# Allegro board control_pcb.brd
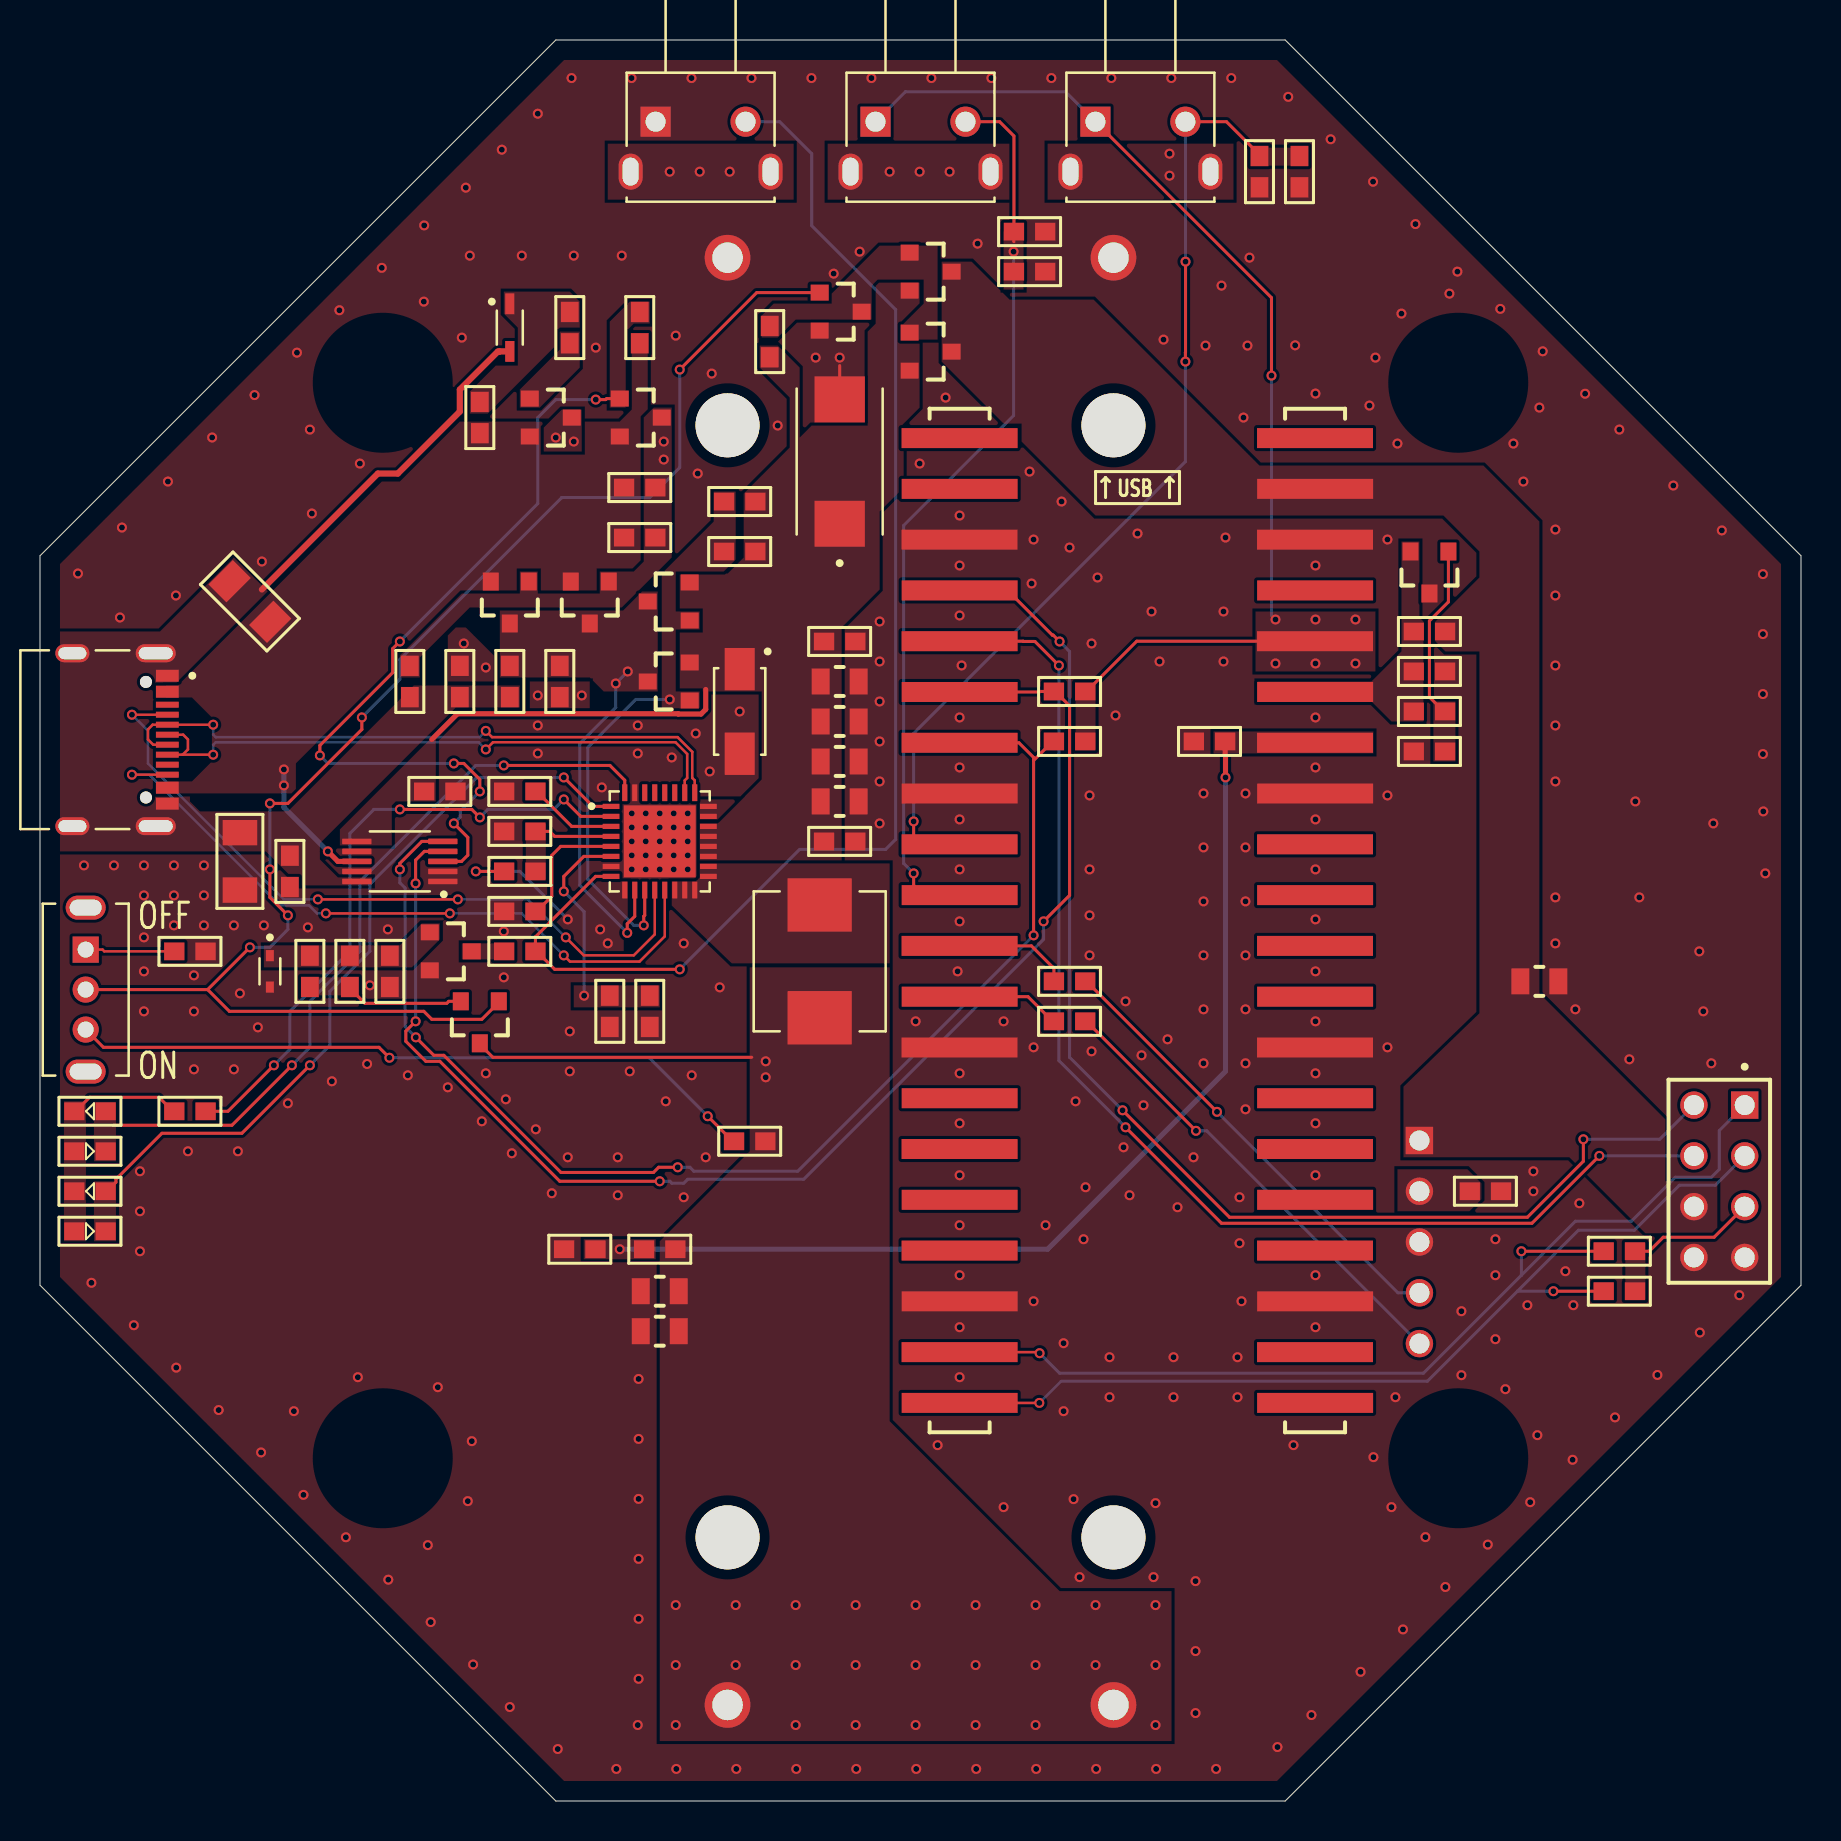
[diagram p0: board, top side]
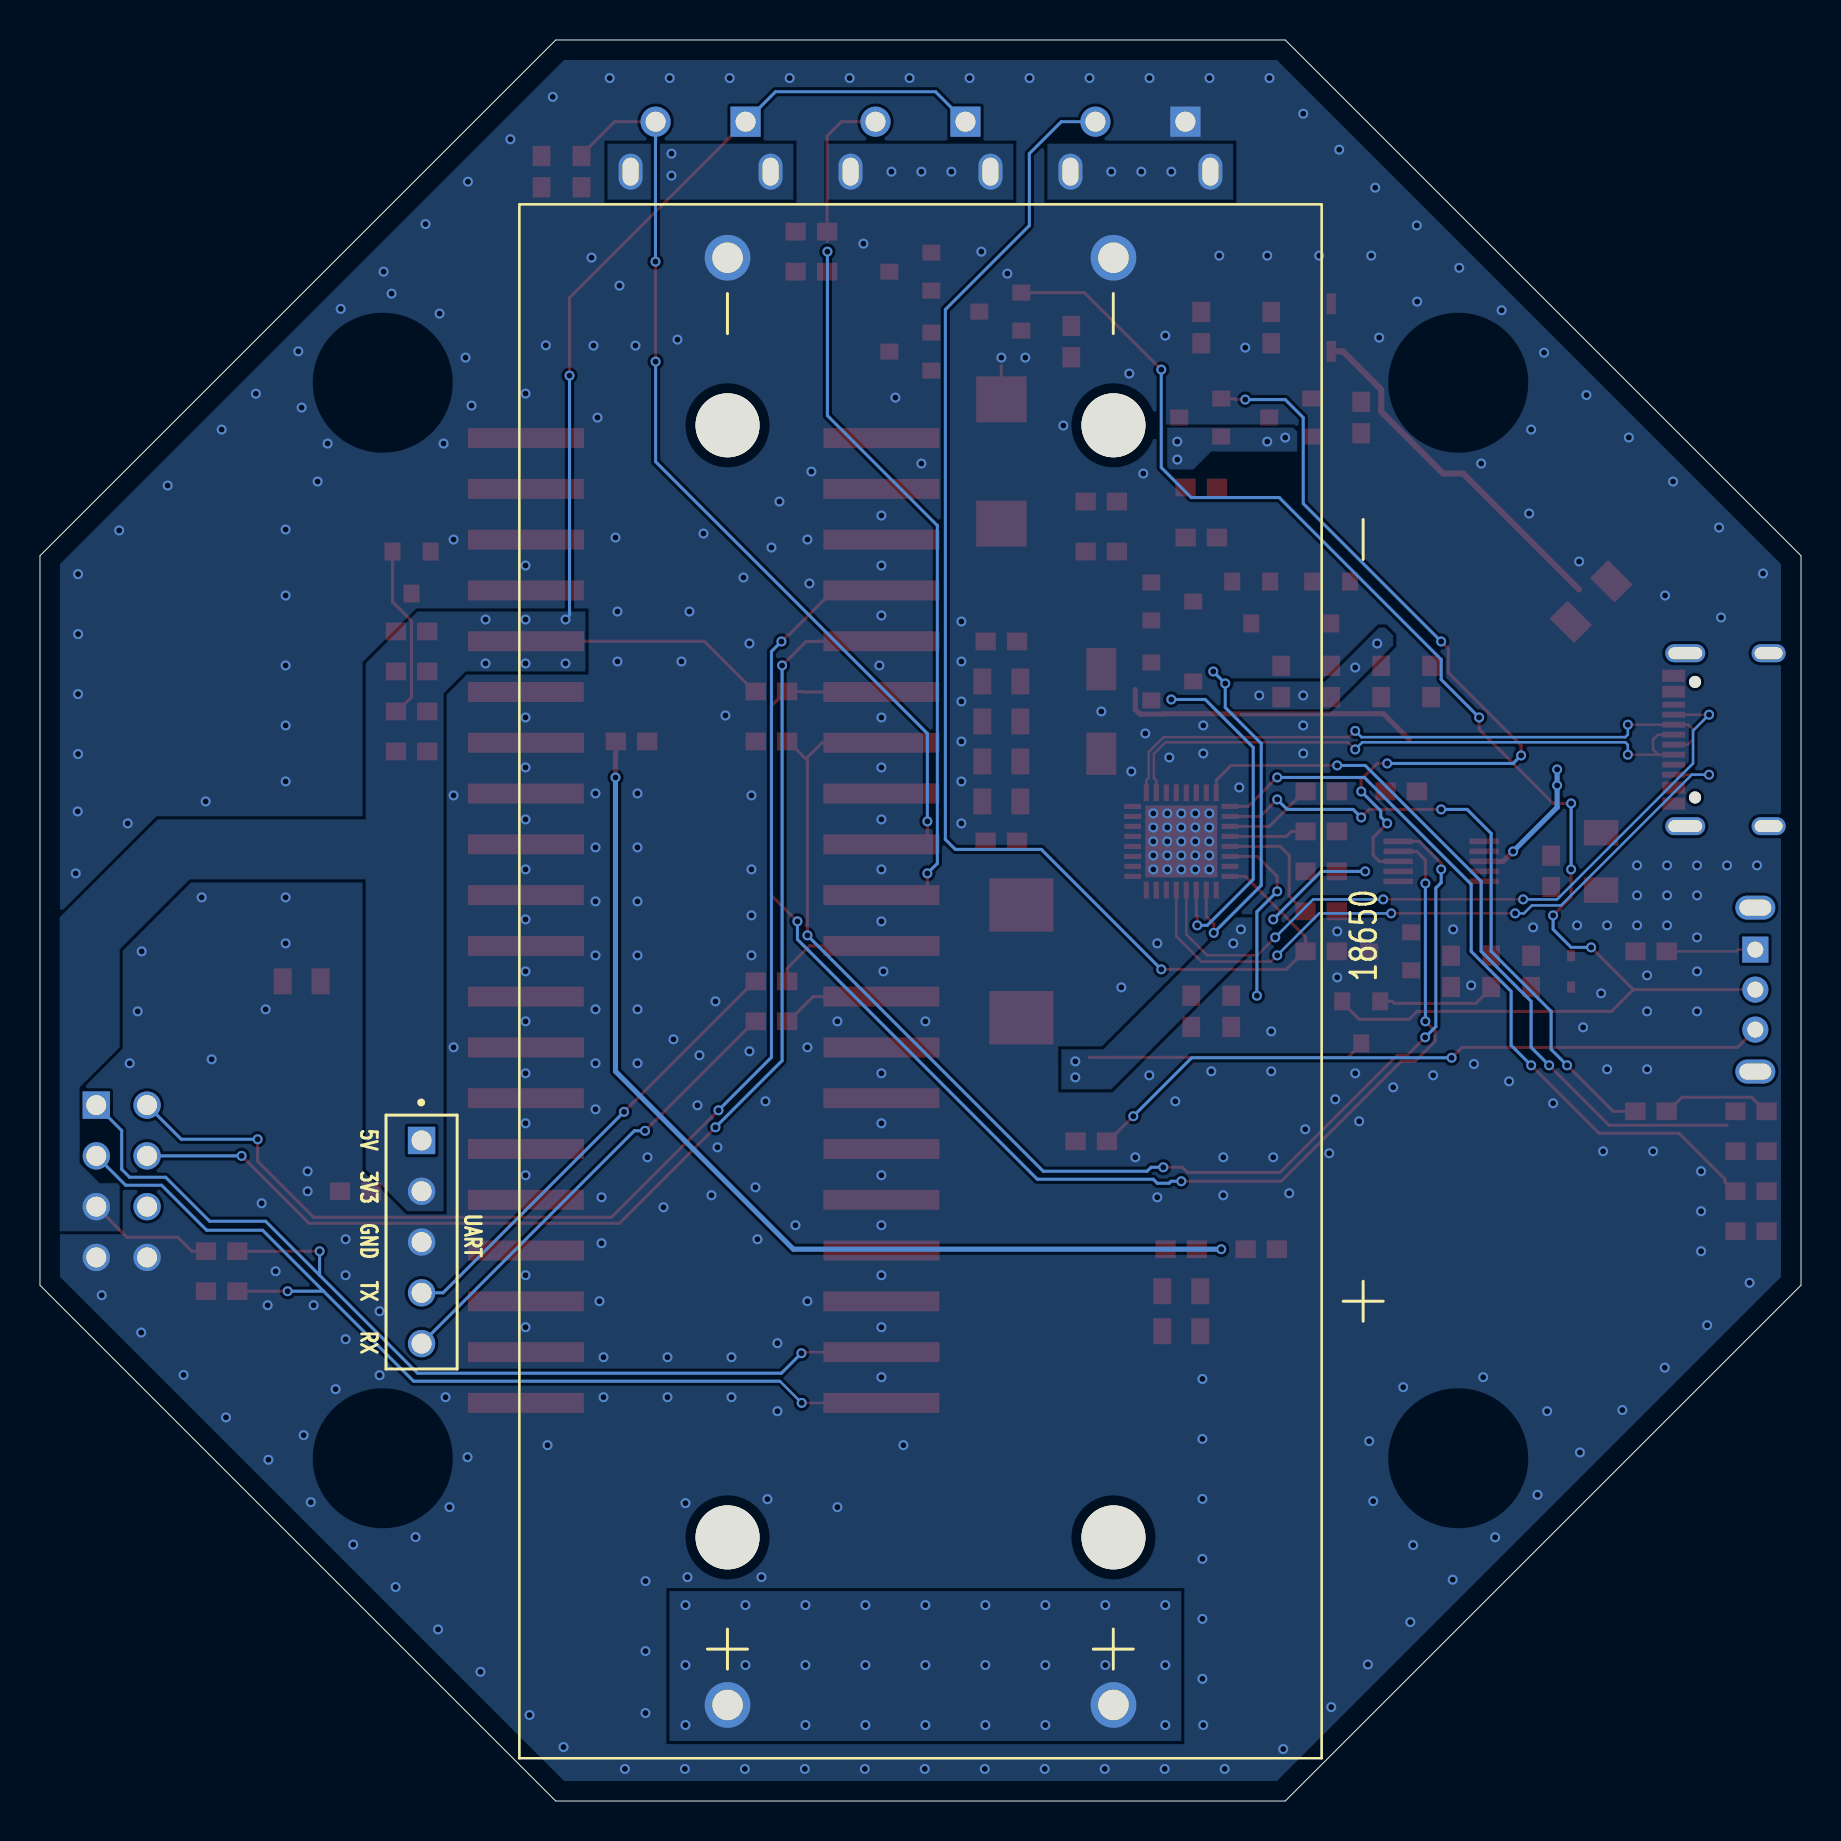
[diagram p1: board, bottom side, seen from below]

Outline 88.09 x 88.09 mm; copper layers: TOP, BOTTOM. Coordinates in mm from the lower left corner of the outline.
Outline path: 0,62.29 25.8,88.09 62.29,88.09 88.09,62.29 88.09,25.8 62.29,0 25.8,0 0,25.8 0,62.29

## Design rules (mm)
constraint set DEFAULT: min track width 0.127

## Placement (name value [footprint] x y rotation side)
C1  1n  [0603]  30 65.7 0 top
C2  10u  [0603]  21 56 270 top
C3  10u  [0603]  23.5 56 270 top
C4  1u  [0603]  35 62.5 180 top
C5  16V 100u  [CAPPM7343X310N]  40 67 90 top
C6  22u  [0805]  40 56 0 top
C7  22u  [0805]  40 54 0 top
C8  22u  [0805]  40 52 0 top
C9  22u  [0805]  40 50 0 top
C10  0.1u  [0603]  40 48 0 top
C11  22u  [0805]  31 25.5 180 top
C12  22u  [0805]  31 23.5 180 top
C13  1u  [0603]  13.5 41.5 90 top
C14  0.1u  [0603]  20 50.5 180 top
C15  0.1u  [0603]  12.5 46.5 90 top
C16  0.1u  [0603]  61 81.5 90 top
C17  0.1u  [0603]  49.5 78.5 180 top
C18  10n  [0603]  69.5 56.5 180 top
C19  10n  [0603]  58.5 53 180 top
D1  SMF5.0CA  [1206]  10.5 60 315 top
D2  BZT52B5V6S  [SOD-323]  23.5 73.7 270 top
D3  SS34  [SMA]  35 54.5 270 top
D4  BAS40X  [SOD-523]  11.5 41.5 270 top
D5  25%  [0603]  2.5 34.5 0 top
D6  50%  [0603]  2.5 32.5 180 top
D7  75%  [0603]  2.5 30.5 0 top
D8  100%  [0603]  2.5 28.5 180 top
D9  H5VLD3B  [0805]  75 41 180 top
D10  H3V3LD5B  [0603]  72.3 30.5 180 top
J1  TYPE-C-31-M-12  [HRO_TYPE-C-31-M-12]  1.62 53.09 270 top
J2  20p socket  [1X20P_SMD_SOCKET]  46 44.04 90 top
J3  20p socket  [1X20P_SMD_SOCKET]  63.78 44.04 90 top
J4  2*4P socket  [SAMTEC_BCS-104-T-D-TE]  84 31 90 top
J5  5pin socket  [5PIN-CONN]  69 30.5 270 bottom
L1  FXL0630-1R0-M  [INDM7066X300N]  39 42 270 top
Q1  SS8550  [SOT23-3]  25.5 69.2 180 top
Q2  SS8550  [SOT23-3]  30 69.2 180 top
Q3  AO3401A  [SOT23-3]  27.5 60 90 top
Q4  AO3401A  [SOT23-3]  23.5 60 90 top
Q5  AO3401A  [SOT23-3]  31.5 60 0 top
Q6  AO3401A  [SOT23-3]  31.5 56 0 top
Q7  MDD2302  [SOT23-3]  22 39 90 top
Q8  MDD2302  [SOT23-3]  20.5 42.5 180 top
Q9  MDD2302  [SOT23-3]  40 74.5 180 top
Q10  AO3401A  [SOT23-3]  44.5 76.5 180 top
Q11  AO3401A  [SOT23-3]  44.5 72.5 180 top
R1  10K  [0603]  7.5 42.5 180 top
R2  10K  [0603]  35.5 33 180 top
R3  0.01R  [1206]  10 47 270 top
R4  1K  [0603]  22 69.2 90 top
R5  10K  [0603]  26.5 73.7 270 top
R6  10K  [0603]  30 73.7 90 top
R7  100K  [0603]  30 63.2 0 top
R8  10K  [0603]  18.5 56 270 top
R9  2R  [0603]  26 56 270 top
R10  10K  [0603]  35 65 180 top
R11  2K  [0603]  40 58 180 top
R12  0R/NS  [0603]  24 42.5 180 top
R13  NS  [0603]  24 44.5 180 top
R14  NS  [0603]  24 50.5 180 top
R15  100R  [0603]  7.5 34.5 0 top
R16  NS/0R  [0603]  24 46.5 180 top
R17  NS/0R  [0603]  24 48.5 180 top
R18  82K/51K  [0603]  28.5 39.5 270 top
R19  1M  [0603]  15.5 41.5 90 top
R20  100K  [0603]  17.5 41.5 270 top
R21  10K  [0603]  36.5 73 90 top
R22  4.7K  [0603]  51.5 53 180 top
R23  4.7K  [0603]  51.5 55.5 180 top
R24  10K  [0603]  63 81.5 270 top
R25  10K  [0603]  49.5 76.5 0 top
R26  1K  [0603]  69.5 58.5 0 top
R27  2K  [0603]  69.5 54.5 0 top
R28  10K  [0603]  69.5 52.5 180 top
R29  10K  [0603]  31 27.6 0 top
R30  20K  [0603]  27 27.6 180 top
R31  51R  [0603]  51.5 41 0 top
R32  51R  [0603]  51.5 39 0 top
R33  NS  [0603]  79 25.5 180 top
R34  NS  [0603]  79 27.5 180 top
RT1  100K_NTC/NS  [0603]  30.5 39.5 270 top
SW1  POWER  [SW_EG1247]  2.29 40.59 270 top
SW2  BUTTON  [SW_TS11-674-73-BK-160-RA-D]  55.04 84 180 top
SW3  BUTTON  [SW_TS11-674-73-BK-160-RA-D]  44.04 84 180 top
SW4  BUTTON  [SW_TS11-674-73-BK-160-RA-D]  33.04 84 180 top
U1  IP5310  [QFN50P500X500X100-33N]  31 48 0 top
U2  2CELLBATT  [18650-PC4]  44.04 41 90 bottom
U3  INA226AIDGSR  [SOP50P490X110-10N]  18 47 180 top
U4  CJ431  [SOT23-3]  69.5 61.5 90 top

## Library data of the parts
C1-C4 C6-C19 = CAP NP
C5 = CAP
D1 D9 = DIODE TVS BI-DIR
D2 = BZX84C5V6/SOT_0
D3 D4 = DIODE_3
D5-D8 = LED
D10 = DIODE TVS BI-DIR_5
J1 = TYPE-C-31-M-12_0
J2 = SSM-120-L-SV-BE_1
J3 = SSM-120-L-SV-BE_2
J4 = BCS-104-T-D-TE_5
J5 = 5pin header_0
L1 = INDUCTOR
Q1 Q2 = 2N6987_7
Q3-Q6 Q10 Q11 = MOSFET P_3
Q7-Q9 = MOSFET N_3
R1-R34 = RESISTOR
RT1 = NTC
SW1 = EG1247_1
SW2-SW4 = TS11-674-73-BK-160-RA-D_0
U1 = IP5310
U2 = 2CELLBATT_0
U3 = INA226AIDGSR_1
U4 = LM431CIM3NOPB_1

## Footprints (pads in the part's own frame, mm; a bottom-side part is the same pattern mirrored in y, then rotated)
1X20P_SMD_SOCKET
  rect 1x5.8 smd: 01(24.13,0.003) 02(21.59,-0.003) 03(19.05,0.003) 04(16.51,-0.003) 05(13.97,0.003) 06(11.43,-0.003) 07(8.89,0.003) 08(6.35,-0.003) 09(3.81,0.003) 10(1.27,-0.003) 11(-1.27,0.003) 12(-3.81,-0.003) 13(-6.35,0.003) 14(-8.89,-0.003) 15(-11.43,0.003) 16(-13.97,-0.003) 17(-16.51,0.003) 18(-19.05,-0.003) 19(-21.59,0.003) 20(-24.13,-0.003)
5PIN-CONN
  rect 1.37x1.37 hole 1: 1(-2.54,0)
  round 1.37 hole 1: 2(0,0) 3(2.54,0) 4(5.08,0) 5(7.62,0)
0603
  rect 1.016x0.889 smd: 1(-0.783,0) 2(0.783,0)
0805
  rect 0.9x1.3 smd: 1(-0.95,0) 2(0.95,0)
1206
  rect 1.27x1.727 smd: 1(-1.435,0) 2(1.435,0)
18650-PC4
  round 3.2 hole 3.2 unplated: (-27.813,-9.652) (-27.813,9.652) (27.813,-9.652) (27.813,9.652)
  round 2.286 hole 1.524: +1(-36.195,9.652) +2(-36.195,-9.652) -1(36.195,9.652) -2(36.195,-9.652)
CAPPM7343X310N
  rect 2.3x2.52 smd: 1(-3.11,0) 2(3.11,0)
HRO_TYPE-C-31-M-12
  round 0.6 hole 0.6 unplated: (-2.89,3.68) (2.89,3.68)
  rect 0.6x1.14 smd: A1_B12(-3.2,4.75) A4_B9(-2.4,4.75) B1_A12(3.2,4.75) B4_A9(2.4,4.75)
  rect 0.3x1.14 smd: A5(-1.25,4.75) A6(-0.25,4.75) A7(0.25,4.75) A8(1.25,4.75) B5(1.75,4.75) B6(0.75,4.75) B7(-0.75,4.75) B8(-1.75,4.75)
  oval 0.9x2 hole 0.6x1.7: S1(-4.325,4.17) S2(4.325,4.17)
  oval 0.9x1.7 hole 0.6x1.4: S3(-4.325,0) S4(4.325,0)
INDM7066X300N
  rect 2.67x3.21 smd: 1(-2.82,0) 2(2.82,0)
QFN50P500X500X100-33N
  custom 0.84x0.26 smd: 1(-2.435,1.75) 2(-2.435,1.25) 3(-2.435,0.75) 4(-2.435,0.25) 5(-2.435,-0.25) 6(-2.435,-0.75) 7(-2.435,-1.25) 8(-2.435,-1.75) 17(2.435,-1.75) 18(2.435,-1.25) 19(2.435,-0.75) 20(2.435,-0.25) 21(2.435,0.25) 22(2.435,0.75) 23(2.435,1.25) 24(2.435,1.75)
  custom 0.26x0.84 smd: 9(-1.75,-2.435) 10(-1.25,-2.435) 11(-0.75,-2.435) 12(-0.25,-2.435) 13(0.25,-2.435) 14(0.75,-2.435) 15(1.25,-2.435) 16(1.75,-2.435) 25(1.75,2.435) 26(1.25,2.435) 27(0.75,2.435) 28(0.25,2.435) 29(-0.25,2.435) 30(-0.75,2.435) 31(-1.25,2.435) 32(-1.75,2.435)
  rect 3.6x3.6 smd: 33(0,0)
SAMTEC_BCS-104-T-D-TE
  rect 1.37x1.37 hole 1: 01(3.81,-1.27)
  round 1.37 hole 1: 02(3.81,1.27) 03(1.27,-1.27) 04(1.27,1.27) 05(-1.27,-1.27) 06(-1.27,1.27) 07(-3.81,-1.27) 08(-3.81,1.27)
SMA
  rect 2.12x1.5 smd: A(2.115,0) C(-2.115,0)
SOD-323
  rect 1.04x0.46 smd: A(1.19,0) C(-1.19,0)
SOD-523
  rect 0.56x0.4 smd: A(0.785,0) C(-0.785,0)
SOP50P490X110-10N
  custom 1.47x0.28 smd: 1(-2.15,1) 2(-2.15,0.5) 3(-2.15,0) 4(-2.15,-0.5) 5(-2.15,-1) 6(2.15,-1) 7(2.15,-0.5) 8(2.15,0) 9(2.15,0.5) 10(2.15,1)
SOT23-3
  rect 0.9x0.8 smd: 1(1,-0.95) 2(1,0.95) 3(-1.1,0)
SW_EG1247
  rect 1.308x1.308 hole 0.8: 1(-2,0)
  round 1.308 hole 0.8: 2(0,0) 3(2,0)
  oval 1.2x2 hole 0.8x1.6: SH1(-4.1,0) SH2(4.1,0)
SW_TS11-674-73-BK-160-RA-D
  rect 1.508x1.508 hole 1: 1(2.25,0)
  round 1.508 hole 1: 2(-2.25,0)
  oval 1.2x1.8 hole 0.8x1.4: 3(3.5,2.5) 4(-3.5,2.5)

## Nets
GND: C5.2 C6.2 C7.2 C8.2 C9.2 C10.2 C11.2 C12.2 C14.1 C15.1 C16.1 C17.1 C18.1 C19.2 D3.A D4.A D9.1 D10.1 J2.03 J2.08 J2.13 J2.18 J3.03 J3.08 J3.13 J3.18 J4.07 J4.08 J5.3 Q8.2(SOURCE) Q9.2(SOURCE) R1.1 R3.2 R11.1 R13.2 R14.2 R17.2 R18.2 R20.2 R24.2 R25.2 R28.2 R30.2 RT1.2 SW4.1 U1.7 U1.31 U1.33 U2.-1 U2.-2 U3.1 U3.2 U3.7 U3.9 U4.3
VBAT: C11.1 C12.1 L1.2 Q7.3 R2.1 R16.2 R29.2 U1.9 U2.+1 U2.+2
VBUS: C3.1 Q3.3 Q4.3 Q5.3 Q6.3 R9.1 U1.10
VBUSG: C4.2 Q5.1 Q6.1 R10.2 U1.11
VDD: D9.2 J3.02 J4.06(VDD) J5.1 Q10.3 Q11.3 R26.2
VIN: U1.23 U1.24
ARGB_DATA_0: J2.04 J4.02
ARGB_DATA_1: J2.05 J4.04
CC1: J1.A5 U1.12
CC2: J1.B5 U1.13
DMC: J1.A7 J1.B7 U1.25
DPA: U1.28
DPC: J1.A6 J1.B6 U1.26
I2C_SCL: J2.20 J4.03 R33.2
I2C_SDA: J2.19 J4.01 R34.2
INA226_IN+: C2.2 C3.2 C15.2 D1.1 D2.A J1.A1_B12 J1.B1_A12 J1.S1 J1.S2 J1.S3 J1.S4 R3.1 R8.2 U3.10
INA226_SCL: J2.07 R22.2 U3.5
INA226_SDA: J2.06 R23.2 U3.4
OCP_ALERT: Q2.1 R6.2 U3.3
PICO_3V3: D10.2 J3.05 J4.05 J5.2 R22.1 R23.1 R33.1 R34.1 SW2.1 SW3.1
PICO_ADC_VREF: C18.2 J3.06 R26.1 R27.1 U4.2
PICO_KEY1: C16.2 J2.09 R24.1 SW2.2(NO)
PICO_KEY2: C17.2 J2.10 R25.1 SW3.2(NO)
PW_KEY: R12.1 SW4.2(NO) U1.8
PW_KEY_SIM: Q8.3 R12.2
SW_SIG: Q7.1 Q9.1 SW1.2
UART_RX: J2.12 R32.1
UART_TX: J2.11 R31.1
USB_VIN: C1.1 D1.2 J1.A4_B9 J1.B4_A9(VBUS#B4_A9) Q1.2(EMITTER) Q2.2(EMITTER) Q3.2(SOURCE) Q4.2(SOURCE) R4.1 R6.1 R7.1 U3.8
VOUT: C4.1 C5.1 C6.1 C7.1 C8.1 C9.1 C10.1 C14.2 D3.C Q5.2(SOURCE) Q6.2(SOURCE) Q10.2(SOURCE) Q11.2(SOURCE) R10.1 R11.2 R21.1 U1.19 U1.20 U1.21 U1.22 U3.6(VS)
N00519: L1.1 U1.14 U1.15 U1.16 U1.17 U1.18
N01391: C2.1 R9.2
N01601: C1.2 Q1.3 Q2.3 Q3.1 Q4.1 R7.2 R8.1
N03695: D5.2 D6.1(CATHODE) U1.32
N03706: D7.2 D8.1(CATHODE) U1.1
N11568: C13.2 D4.C Q8.1 R19.2 R20.1
N11722: C13.1 Q7.2(SOURCE) R19.1
N15301: R27.2 R28.1 U4.1(REF)
N16937: C19.1 J3.07 R29.1 R30.1
N17479: R13.1 U1.5
N31837: SW3.3 SW3.4
N42566: R2.2 SW1.3
N42568: R1.2 SW1.1
N43496: R15.2 U1.2
N43589: R18.1 RT1.1 U1.6
N44439: R16.1 R17.1 U1.4(VTHS)
N52871: R14.1 U1.3
N71300: Q1.1 R5.2
N156569: D2.C R4.2 R5.1
N183609: J5.4 R31.2
N183613: J5.5 R32.2
N219565: Q9.3 Q10.1 Q11.1 R21.2
N224890: D5.1(CATHODE) D6.2 D7.1(CATHODE) D8.2 R15.1
N244106: SW2.3 SW2.4
N244438: SW4.3 SW4.4

Pads without a net: J1 A8 B8; J2 01 02 14 15 16 17; J3 01 04 09 10 11 12 14 15 16 17 19 20; SW1 SH1 SH2; U1 27 29 30

## Via types
v1: diameter 0.5, hole 0.3, TOP to BOTTOM, 483 vias

## Routing (per net, layer and track width the routed paths; a pad name or vN(x,y) marks a point on that pad's centre or on a via; arc(x,y) is an arc through that point)
GND: length 1.7
  TOP w0.152: C5.2 40,71.8
  vias: v1(1.9,61.4) v1(2.2,46.8) v1(2.57,25.92) v1(3.7,46.8) v1(4,59.2) v1(4.1,63.7) v1(4.69,23.8) v1(5,31.5) v1(5,29.5) v1(5,27.5) v1(5.2,46.8) v1(5.2,45.3) v1(5.2,43.2) v1(5.2,41.5) v1(5.2,39.5) v1(6.4,66) v1(6.7,46.8) v1(6.7,45.3) v1(6.7,43.8) v1(6.8,60.3) v1(6.82,21.68) v1(7.4,32.5) v1(7.7,41.3) v1(7.7,39.5) v1(7.7,36.6) v1(8.2,46.8) v1(8.2,45.3) v1(8.2,43.8) v1(8.61,68.2) v1(8.94,19.56) v1(9.7,43.8) v1(9.7,36.6) v1(9.9,32.5) v1(10,40.4) v1(10.73,70.33) v1(10.9,38.7) v1(11.1,62) v1(11.06,17.44) v1(11.2,43.8) v1(12.4,34.9) v1(12.7,19.5) v1(12.85,72.45) v1(13.18,15.31) v1(13.4,43.7) v1(13.5,68.6) v1(13.6,64.4) v1(14.6,36) v1(14.98,74.57) v1(15.3,13.19) v1(15.9,21.2) v1(16,66.9) v1(16.36,36.87) v1(16.5,40.8) v1(17.1,76.69) v1(17.4,43.6) v1(17.42,11.07) v1(18.4,36.3) v1(19.22,78.81) v1(19.2,75) v1(19.4,12.8) v1(19.54,8.95) v1(19.9,20.7) v1(20.4,35.7) v1(21.1,73.2) v1(21.3,80.7) v1(21.4,15) v1(21.5,77.3) v1(21.6,18) v1(21.66,6.83) v1(22.1,34) v1(22.3,36.4) v1(23.1,82.6) v1(23.2,43.5) v1(23.2,41.2) v1(23.3,35.1) v1(23.5,4.7) v1(23.6,32.4) v1(24.1,77.3) v1(24.8,33.6) v1(24.9,84.4) v1(24.9,53.8) v1(24.9,52.4) v1(25.6,30.4) v1(25.9,2.6) v1(26.4,32.2) v1(26.5,38.5) v1(26.5,36.5) v1(26.59,86.18) v1(26.7,77.3) v1(27.8,72.7) v1(28.1,50.7) v1(28.83,1.6) v1(28.9,32.2) v1(28.9,30.3) v1(29.1,77.3) v1(29.5,36.5) v1(29.59,86.18) v1(29.6,49.4) v1(29.6,48.7) v1(29.6,48) v1(29.6,47.3) v1(29.6,46.6) v1(29.9,53.8) v1(29.9,52.4) v1(29.94,21.11) v1(29.94,18.11) v1(29.94,15.11) v1(29.94,12.11) v1(29.94,9.11) v1(29.94,6.11) v1(29.9,3.8) v1(30.3,49.4) v1(30.3,48.7) v1(30.3,48) v1(30.3,47.3) v1(30.3,46.6) v1(31,49.4) v1(31,48.7) v1(31,48) v1(31,47.3) v1(31,46.6) v1(31.3,35) v1(31.6,52.2) v1(31.7,49.4) v1(31.7,48.7) v1(31.7,48) v1(31.7,47.3) v1(31.7,46.6) v1(31.8,73.3) v1(31.83,1.6) v1(32.2,42.9) v1(32.2,30.2) v1(32.4,49.4) v1(32.4,48.7) v1(32.4,48) v1(32.4,47.3) v1(32.4,46.6) v1(32.59,86.18) v1(32.6,36.3) v1(32.8,53.4) v1(32.9,66.4) v1(33.3,32.2) v1(33.5,51.5) v1(33.6,71.4) v1(34,40.7) v1(34.83,1.6) v1(35,54.5) v1(35.59,86.18) v1(36.9,68.8) v1(37.83,1.6) v1(38.59,86.18) v1(38.8,72.2) v1(39.7,76.4) v1(40,72.2) v1(40.83,1.6) v1(41,77.5) v1(41.59,86.18) v1(42,59) v1(42,57) v1(42,55) v1(42,53) v1(42,51) v1(42,48.9) v1(43.8,39) v1(43.83,1.6) v1(44,66.9) v1(44.59,86.18) v1(44.9,17.8) v1(45.3,70.2) v1(45.9,41.5) v1(46,64.3) v1(46,61.8) v1(46,59.3) v1(46,54.2) v1(46,51.7) v1(46,49.1) v1(46,46.6) v1(46,44) v1(46,36.4) v1(46,33.9) v1(46,31.3) v1(46,28.8) v1(46,26.3) v1(46,23.7) v1(46,21.2) v1(46.1,56.8) v1(46.83,1.6) v1(46.9,77.9) v1(47.59,86.18) v1(48.2,39) v1(48.2,14.7) v1(49.5,66.5) v1(49.6,60.9) v1(49.7,63.1) v1(49.7,37.7) v1(49.7,25) v1(49.83,1.6) v1(50.3,28.8) v1(50.59,86.18) v1(51.1,65) v1(51.2,22.9) v1(51.2,19.5) v1(51.5,62.7) v1(51.7,15.1) v1(51.8,35) v1(52,11.2) v1(52.2,28.1) v1(52.3,30.7) v1(52.5,50.3) v1(52.5,46.6) v1(52.5,44.3) v1(52.5,42.3) v1(52.6,57.9) v1(52.6,37.5) v1(52.83,1.6) v1(52.9,61.2) v1(53.5,22.2) v1(53.5,20.2) v1(53.59,86.18) v1(53.8,54.3) v1(54.2,32.7) v1(54.3,40) v1(54.5,30.3) v1(54.9,63.4) v1(55.1,37.3) v1(55.2,34.8) v1(55.6,59.5) v1(55.7,11.2) v1(55.8,14.9) v1(55.83,1.6) v1(56,57) v1(56.2,73.1) v1(56.4,38.1) v1(56.59,86.18) v1(56.7,22.2) v1(56.7,20.2) v1(56.9,29.7) v1(57.7,32.2) v1(57.8,11) v1(57.8,7.5) v1(57.8,4.4) v1(58.2,50.4) v1(58.2,47.7) v1(58.2,45) v1(58.2,42.3) v1(58.2,39.6) v1(58.2,36.9) v1(58.3,72.8) v1(58.83,1.6) v1(59.1,75.8) v1(59.2,59.5) v1(59.2,57) v1(59.3,63.2) v1(59.59,86.18) v1(59.9,22.2) v1(59.9,20.2) v1(60,30.2) v1(60,27.9) v1(60.1,25) v1(60.2,69.2) v1(60.3,50.4) v1(60.3,47.7) v1(60.3,45) v1(60.3,42.3) v1(60.3,39.6) v1(60.3,36.9) v1(60.3,34.6) v1(60.4,72.8) v1(60.5,77.2) v1(61.9,2.7) v1(62.44,85.24) v1(62.7,17.8) v1(62.78,72.81) v1(63.6,4.3) v1(63.8,70.4) v1(63.8,61.8) v1(63.8,54.2) v1(63.8,51.7) v1(63.8,49.1) v1(63.8,46.6) v1(63.8,44.1) v1(63.8,41.5) v1(63.8,39) v1(63.8,36.4) v1(63.8,33.9) v1(63.8,31.3) v1(63.8,26.3) v1(63.8,23.7) v1(64.56,83.12) v1(66.06,6.46) v1(66.5,69.8) v1(66.68,81) v1(66.7,17.2) v1(66.8,72.2) v1(67.4,63.1) v1(67.4,50.3) v1(67.4,37.7) v1(67.6,14.7) v1(67.8,20.2) v1(67.9,67.9) v1(68.1,74.4) v1(68.18,8.58) v1(68.8,78.88) v1(69.3,13.2) v1(70.3,10.7) v1(70.5,75.4) v1(70.9,76.5) v1(71.1,24.5) v1(71.1,21.3) v1(72.42,12.83) v1(72.8,28.1) v1(72.8,26.3) v1(72.8,23.1) v1(73.04,74.64) v1(73.3,20.6) v1(73.7,67.9) v1(74.2,66) v1(74.4,24.8) v1(74.54,14.95) v1(74.7,31.5) v1(74.7,30.5) v1(74.9,18.3) v1(75,69.7) v1(75.17,72.51) v1(75.8,63.6) v1(75.8,60.3) v1(75.8,56.8) v1(75.8,53.8) v1(75.8,51) v1(75.8,45.2) v1(75.8,42.9) v1(76.3,26.5) v1(76.7,24.8) v1(76.66,17.07) v1(76.8,39.6) v1(77,29.9) v1(77.29,70.39) v1(78.78,19.19) v1(79,68.6) v1(79.5,37.1) v1(79.8,50) v1(80,45.2) v1(80.9,21.31) v1(81.7,65.8) v1(83,42.5) v1(83.03,23.43) v1(83.2,39.5) v1(83.6,36.9) v1(83.7,48.9) v1(84.13,63.55) v1(85,25.3) v1(86.18,61.37) v1(86.18,58.37) v1(86.18,55.37) v1(86.18,52.37) v1(86.2,49.5) v1(86.3,46.4)
VBAT: length 20.9
  TOP w0.152: Q7.3 22,37.85 22.65,37.2 35.6,37.2 ; R16.2 v1(21.8,46.5)
  BOTTOM w0.152: v1(21.8,46.5) 24,46.5 v1(26.4,44.1)
  vias: v1(28.02,43.6) v1(28.4,42.9) v1(31.8,9.8) v1(31.8,6.8) v1(31.8,3.8) v1(34.8,9.8) v1(34.8,6.8) v1(36.3,37) v1(36.3,36.2) v1(37.8,9.8) v1(37.8,6.8) v1(37.8,3.8) v1(40.8,9.8) v1(40.8,6.8) v1(40.8,3.8) v1(43.8,9.8) v1(43.8,6.8) v1(43.8,3.8) v1(46.8,9.8) v1(46.8,6.8) v1(46.8,3.8) v1(49.8,9.8) v1(49.8,6.8) v1(49.8,3.8) v1(52.8,9.8) v1(52.8,6.8) v1(55.8,9.8) v1(55.8,6.8) v1(55.8,3.8)
VBUS: length 17.3
  TOP w0.152: U1.10 29.75,44.25 29.38,43.88 v1(29.38,43.42)
  BOTTOM w0.152: v1(29.38,43.42) 27,45.8 27,52.9 28.8,54.7 v1(28.8,55.9) v1(29.4,56.5)
VBUSG: length 17.2
  TOP w0.152: v1(30.2,43.8) 30.2,44.25 30.25,44.3 U1.11
  BOTTOM w0.152: v1(31.5,55.1) 29.8,55.1 27.4,52.7 27.4,46.1 29.7,43.8 v1(30.2,43.8)
ARGB_DATA_0: length 64.6
  TOP w0.152: v1(51,58) 50.68,58.32 50.64,58.32 48.4,60.55 J2.04 ; v1(54.15,34.55) 59.5,29.2 74.4,29.2 77.2,32 v1(77.2,33.1)
  BOTTOM w0.152: v1(51,58) 51.5,57.5 51.5,37.2 v1(54.15,34.55) ; J4.02 81.02,33.1 v1(77.2,33.1)
ARGB_DATA_1: length 61.8
  TOP w0.152: J2.05 49.18,58.01 49.19,58 49.77,58 v1(50.97,56.8) ; v1(54.3,33.7) 59.1,28.9 74.63,28.9 v1(78,32.27)
  BOTTOM w0.152: v1(54.3,33.7) 50.97,37.03 v1(50.97,56.8) ; v1(78,32.27) J4.04
CC1: length 37
  TOP w0.127: 6.87,54.34 J1.A5 v1(4.6,54.34) ; v1(26.3,43.2) 27.2,42.3 29.7,42.3 30.75,43.35 U1.12 ; v1(13.9,45.1) v1(20.9,45.1)
  BOTTOM w0.127: v1(26.3,43.2) 24.4,45.1 v1(20.9,45.1) ; v1(13.9,45.1) 12.2,45.1 5.4,51.9 5.4,53.54 v1(4.6,54.34)
CC2: length 35.6
  TOP w0.127: 6.87,51.34 J1.B5 v1(4.6,51.34) ; v1(26.2,42.3) 26.51,41.99 29.99,41.99 31.25,43.25 U1.13 ; v1(14.3,44.4) v1(20.5,44.4)
  BOTTOM w0.127: v1(4.6,51.34) 5.46,51.34 12,44.8 13.46,44.8 13.86,44.4 v1(14.3,44.4) ; v1(20.5,44.4) 24.1,44.4 v1(26.2,42.3)
DMC: length 32.1
  TOP w0.127: J1.A7 5.66,52.84 5.4,53.1 5.4,53.6 5.64,53.84 J1.B7 v1(8.66,53.84) ; v1(22.3,53.53) 22.61,53.21 31.89,53.21 32.63,52.48 32.63,51.17 32.75,51.05 U1.25
  BOTTOM w0.127: v1(22.3,53.53) 21.99,53.21 8.79,53.21 8.66,53.34 v1(8.66,53.84)
DPC: length 31.1
  TOP w0.127: 7.14,52.34 J1.B6 ; 7.14,52.34 7.4,52.6 7.4,53.1 7.16,53.34 J1.A6 ; 7.14,52.34 v1(8.66,52.34) ; U1.26 32.25,51.05 32.37,51.17 32.37,52.37 31.79,52.96 22.66,52.96 v1(22.3,52.6)
  BOTTOM w0.127: v1(22.3,52.6) 21.94,52.96 8.79,52.96 8.66,52.83 v1(8.66,52.34)
I2C_SCL: length 48.7
  TOP w0.127: J2.20 v1(49.99,19.91)
  TOP w0.152: R33.2 v1(75.7,25.5)
  BOTTOM w0.127: v1(49.99,19.91) 51.07,21 51.1,21
  BOTTOM w0.152: 73.9,25.5 76.95,28.55 79.75,28.55 82,30.8 83.8,30.8 J4.03 ; 73.9,25.5 69.4,21 51.1,21 ; 73.9,25.5 v1(75.7,25.5)
I2C_SDA: length 51.7
  TOP w0.127: v1(50,22.4) 49.95,22.45 J2.19
  TOP w0.152: R34.2 v1(74.1,27.5)
  BOTTOM w0.152: 74.1,26.3 76.8,29 79.6,29 81.8,31.2 83.6,31.2 84,31.6 84,33.54 J4.01 ; 74.1,26.3 69.2,21.4 51,21.4 v1(50,22.4) ; 74.1,26.3 v1(74.1,27.5)
INA226_IN+: length 18
  TOP w0.305: 11.1,60.6 16.9,66.4 17.9,66.4 21,69.5 21,70.6 22.9,72.5 22.98,72.5 22.99,72.51 D2.A
INA226_SCL: length 64.7
  TOP w0.152: v1(31.9,31.7) 30.95,31.7 30.69,31.44 26.06,31.44 20.2,37.3 19.7,37.3 v1(18.8,38.2) ; R22.2 50.65,53 49.7,52.05 ; 49.7,52.05 49.7,52.2 48.97,52.93 J2.07 ; 49.7,52.05 v1(49.7,43.3) ; U3.5 19.1,48 18,46.9 v1(18,46.6)
  BOTTOM w0.152: v1(18,46.6) 18,45.93 18.27,45.67 18.27,38.73 v1(18.8,38.2) ; v1(49.7,43.3) 37.9,31.5 32.71,31.5 32.51,31.7 v1(31.9,31.7)
INA226_SDA: length 68.7
  TOP w0.152: v1(31,31) 26,31 20,37 19.3,37 18.3,38 18.3,38.51 v1(18.79,39) ; v1(50.2,44) 51.5,45.3 51.5,54.78 50.78,55.5 R23.2 50.01,55.5 49.98,55.47 J2.06 ; U3.4 19.22,47.5 18.79,47.06 v1(18.79,45.9)
  BOTTOM w0.152: v1(50.2,44) 50.2,43.1 38.2,31.1 32.4,31.1 32.2,30.9 31.61,30.9 31.51,31 v1(31,31) ; v1(18.79,39) v1(18.79,45.9)
OCP_ALERT: length 40.4
  TOP w0.152: Q2.1 28.35,70.15 28.3,70.1 v1(27.8,70.1) ; v1(18,58) 17.64,57.64 17.64,56.44 14,52.8 v1(14,52.3) ; U3.3 21.09,47 21.4,47.31 21.4,48.2 v1(20.7,48.9) ; v1(22,50.5) 22,51.1 21.2,51.9 v1(20.7,51.9)
  BOTTOM w0.152: v1(18,58) 24.9,64.9 24.9,69.2 25.8,70.1 v1(27.8,70.1) ; v1(20.7,48.9) 21.02,49.22 21.02,49.52 v1(22,50.5) ; v1(20.7,51.9) 14.4,51.9 v1(14,52.3)
PICO_3V3: length 59.5
  TOP w0.152: J3.05 54.86,58.01 52.35,55.5 ; J4.05 83.74,28.2 81.19,28.2 80.49,27.5 R34.1 ; v1(61.6,71.3) 61.6,75.19 SW2.1
  TOP w0.254: R23.1 52.35,55.5
  BOTTOM w0.152: SW3.1 43.29,85.5 51.29,85.5 SW2.1 ; v1(61.6,71.3) 61.6,59.3
  vias: v1(61.8,59.1) v1(61.8,56.9) v1(63.8,59.1) v1(63.8,56.9) v1(65.8,59.1) v1(65.8,56.9)
PICO_KEY1: length 48.3
  TOP w0.152: v1(57.29,72) 57.29,72.46 57.3,72.47 v1(57.3,77) ; J2.09 44.15,47.85 43.7,48.3 v1(43.7,49) ; SW2.2 59.35,84 61,82.35 C16.2
  BOTTOM w0.152: v1(57.29,72) 57.29,66.99 43.7,53.4 v1(43.7,49) ; SW2.2 57.29,83.04 57.3,83.04 v1(57.3,77)
PICO_KEY2: length 44.2
  TOP w0.152: C17.2 48.72,83.28 48,84 SW3.2 ; 48.72,78 48.7,78.02 ; J2.10 44.19,45.31 43.7,45.8 v1(43.7,46.4)
  BOTTOM w0.152: v1(48.7,77.5) 48.7,69.3 43.2,63.8 43.2,46.9 v1(43.7,46.4)
PW_KEY: length 66.9
  TOP w0.152: v1(32,41.6) 25.75,41.6 24.85,42.5 R12.1 24.78,43.22 25.52,43.96 25.52,43.97 27.8,46.25 U1.8
  BOTTOM w0.152: SW4.2 37,84 38.6,82.4 38.6,78.8 42.8,74.6 42.8,48.1 42.3,47.6 38,47.6 v1(32,41.6)
SW_SIG: length 75.5
  TOP w0.152: Q9.1 35.85,75.45 v1(32,71.6) ; Q7.1 22.95,39.95 22.1,39.1 19.6,39.1 19.2,39.5 9.47,39.5 8.39,40.59 ; 8.39,40.59 SW1.2 ; 8.39,40.59 v1(10.5,42.7) ; v1(12.4,44.3) 11.5,45.2 v1(11.5,46.6) ; v1(16.1,54.2) 16.1,53.6 12.4,49.9 v1(11.5,49.9)
  BOTTOM w0.152: v1(16.1,54.2) 18,56.1 18,57.1 26.1,65.2 30.5,65.2 32,66.7 v1(32,71.6) ; v1(11.5,46.6) v1(11.5,49.9) ; v1(12.4,44.3) 12.4,43.6 11.5,42.7 v1(10.5,42.7)
UART_RX: length 5.2
  TOP w0.152: R32.1 50.65,39 49.42,40.23 J2.12
UART_TX: length 5.9
  TOP w0.152: 50.65,41 R31.1 50.72,41.65 49.59,42.77 J2.11
USB_VIN: length 6.7
  TOP w0.254: v1(14.4,47.5) 14.9,47 U3.8
  BOTTOM w0.254: v1(14.4,47.5) 12.2,49.7 v1(12.2,50.8) v1(12.2,51.6)
VOUT: length 15.4
  TOP w0.254: 19.6,53.1 20.88,54.38 31.92,54.38 31.93,54.37 33.07,54.37 33.3,54.6 33.3,55.6
  TOP w0.256: 36.5,72.15 R21.1
N01391:
  vias: v1(21.2,57.9) v1(22.3,56.7) v1(24.9,55.3) v1(27.1,55.3)
N01601:
  vias: v1(25.8,68.2) v1(26.7,68) v1(31.2,68) v1(31.2,67.1)
N03695: length 37.3
  TOP w0.152: v1(23.2,51.8) 28.51,51.8 29.25,51.06 U1.32 ; v1(12.6,36.8) 9.6,33.8 3.7,33.8
  BOTTOM w0.152: v1(23.2,51.8) 21.8,51.8 16,46 16,42.5 13.5,40 13.5,37.7 v1(12.6,36.8)
N03706: length 38.1
  TOP w0.152: v1(13.5,36.8) 10.1,33.4 6.1,33.4 3.8,31.1 3.8,30.95 3.35,30.5 D7.2 ; v1(26.2,51.2) 26.21,51.2 27.66,49.75 U1.1
  BOTTOM w0.152: v1(13.5,36.8) 14.5,37.8 14.5,40.5 16.5,42.5 16.5,45.85 21.85,51.2 v1(26.2,51.2)
N11722: length 6
  TOP w0.152: R19.1 15.5,40.65 16.25,39.9 20.35,39.9 20.45,40 Q7.2
N15301: length 8.8
  TOP w0.152: 70.22,54.5 69.5,55.22 69.5,59.03 70.45,59.98 U4.1
  TOP w0.203: 70.22,54.5 R27.2
N16937: length 50.5
  TOP w0.254: v1(59.3,51.2) 59.3,52.28 59.28,52.3 C19.1
  BOTTOM w0.254: v1(59.3,51.2) 59.3,36.5 50.4,27.6 v1(29,27.6)
N17479: length 6.3
  TOP w0.152: R13.1 24.85,44.5 25.6,45.25 25.6,47.3 26.05,47.75 U1.5
N31837:
  vias: v1(42.5,81.5) v1(44,81.5) v1(45.5,81.5)
N42566: length 34.7
  TOP w0.152: v1(33.4,34.25) 34.65,33 R2.2 ; v1(17.48,37.18) 16.96,37.7 3.17,37.7 SW1.3
  BOTTOM w0.152: v1(17.48,37.18) 30.47,37.18 v1(33.4,34.25)
N42568: length 4.5
  TOP w0.127: SW1.1 3.13,42.59 3.22,42.5 R1.2
N43496: length 32
  TOP w0.152: v1(26.2,50.1) 27.05,49.25 U1.2 ; v1(22,49.2) 21.6,49.6 v1(18,49.6) ; v1(11.7,36.8) 9.4,34.5 R15.2
  BOTTOM w0.152: v1(11.7,36.8) 12.5,37.6 12.5,39.5 15.5,42.5 15.5,48.4 16.7,49.6 v1(18,49.6) ; v1(26.2,50.1) 25.7,49.6 22.4,49.6 v1(22,49.2)
N43589: length 9.2
  TOP w0.152: v1(26.2,45.5) 26.2,46.25 27.2,47.25 U1.6
  BOTTOM w0.152: v1(27.22,40.28) 27.22,44.48 v1(26.2,45.5)
N44439: length 3.9
  TOP w0.152: R17.1 25.49,48.5 25.74,48.25 U1.4
N52871: length 4.5
  TOP w0.152: U1.3 26.6,48.75 24.85,50.5 R14.1
N183609: length 23.2
  TOP w0.152: R31.2 52.35,41 v1(58.87,34.47)
  BOTTOM w0.152: v1(58.87,34.47) 67.93,25.42 J5.4
N183613: length 23.4
  TOP w0.152: v1(57.82,33.52) 52.35,39 R32.2
  BOTTOM w0.152: v1(57.82,33.52) 58.36,33.52 J5.5
N224890: length 5.6
  TOP w0.152: D5.1 1.78,34.5 2.48,35.2 5.95,35.2 6.65,34.5 R15.1
N244106:
  vias: v1(56.5,82.4) v1(56.5,81.3)
N244438:
  vias: v1(31.5,81.5) v1(33,81.5) v1(34.5,81.5)

## Copper pours and planes (outline as drawn; the poured copper is in the pictures)
GND on TOP: 1,61.87 26.21,87.09 61.87,87.09 87.09,61.87 87.09,26.21 61.87,1 26.21,1 1,26.21 ; 19 cut-outs
GND on BOTTOM: 1,61.87 26.21,87.09 61.87,87.09 87.09,61.87 87.09,26.21 61.87,1 26.21,1 1,26.21 ; 6 cut-outs
VBAT on TOP: 35.5,41.7 42.5,41.7 42.5,19 51,10.5 56.6,10.5 56.6,3 31,3 31,28 35.5,32.5
VBAT on TOP: 25.8,44 27.8,42 28.8,42 29.2,42.4 29.2,44 29.4,44.2 29.4,46 27.8,46
VBAT on BOTTOM: 27.3,44.2 27.3,42.8 34.5,35.6 37,35.6 37,37.6 34.9,37.6 28.3,44.2
VBAT on BOTTOM: 56.6,3 56.6,10.5 31,10.5 31,3
VBUS on TOP: 23,59.6 23,56.2 27.5,56.2 28.2,55.5 30.9,55.5 30.9,60.5 29.1,60.5 28.2,59.6
VBUSG on TOP: 33.7,65.5 33.7,64 31.1,61.4 31.1,54.6 33,54.6 33,55.5 31.8,55.5 31.8,58.6 33,58.6 33,59.5 31.8,59.5 31.8,61.5 34.2,61.5 34.8,62.1 34.8,65.5
VDD on TOP: 45.1,77 46.6,77 48.5,75.1 52.7,75.1 61,66.8 72.2,66.8 75,64 75,40.4 81.3,34.1 81.3,31 83.9,31 83.9,28.4 80.3,28.4 76.5,32.2 68.2,32.2 68.2,35.73 72,39.4 72,57.5 70.3,57.5 69.8,58 69.8,59 72,61.2 72,62.5 70.2,64.3 52.8,64.3 49.1,68 49.1,68.9 48.2,68.9 45.1,72
VIN on TOP: 33,49.1 33.9,49.1 34.9,50.1 33,50.1
INA226_IN+ on TOP: 1,58.5 6,58.5 9.7,62.2 11.4,60.5 7.5,56.6 7.5,50 8,49.5 12.4,49.5 18.7,55.8 24,55.8 24,54.7 20.8,54.7 14,47.9 14,47.1 14.9,46.2 16.6,46.2 16.6,45.8 13,45.8 11.3,47.5 1,47.5 ; 1 cut-out
OCP_ALERT on TOP: 28.5,69.7 29.3,69.7 29.3,73.5 29.7,73.9 30.5,73.9 30.5,75 29.5,75 28.5,74
PICO_3V3 on TOP: 67.9,29.5 67.9,31.6 71.4,31.6 72.1,30.9 72.1,30.1 71.5,29.5
PICO_3V3 on TOP: 60.8,59.5 60.8,56.5 66.8,56.5 66.8,59.5
PICO_3V3 on TOP: 79.3,27.9 79.3,25.1 80.3,25.1 80.3,27.9
PICO_3V3 on TOP: 51.8,55.9 51.8,52.6 52.8,52.6 52.8,55.9
PICO_3V3 on BOTTOM: 60.8,59.5 69.2,59.5 71.8,56.9 71.8,49.1 82.2,49.1 87.1,44.2 87.1,28.5 84.1,28.5 84.1,30.9 85.1,30.9 86.1,31.9 86.1,35.7 84.1,37.7 84.1,42.6 80.6,46.1 71.8,46.1 71.8,31.6 69.7,29.5 67.9,29.5 67.9,55.4 66.8,56.5 60.8,56.5
PICO_ADC_VREF on TOP: 69,63 69,59.2 69.2,59 69.2,54 67.6,54 66.6,55 60.9,55 60.9,56 66.6,56 68.1,57.5 68.1,63
PICO_KEY1 on TOP: 60.6,82.7 60.6,81.8 63.4,81.8 63.4,82.7
PICO_KEY2 on TOP: 48.2,78.5 48.2,75.6 49.2,75.6 49.2,78.5
PW_KEY_SIM on TOP: 21.1,42.9 23.7,42.9 23.7,42.1 21.1,42.1
USB_VIN on TOP: 29.6,73.4 30.4,73.4 30.4,69 30.1,69 30.1,60.5 21.4,60.5 12.8,51.9 12.8,50.4 6.3,50.4 6.3,51 7.6,51 8.6,52 8.6,54.2 7.6,55.2 6.3,55.2 6.3,55.8 6.9,55.8 17.1,66 18,66 21,69 29,69 29.6,69.6
VOUT on TOP: 15,47.8 17.6,47.8 17.6,49.8 17.8,50 19.8,50 19.8,53.2 19.6,53.2 15,48.6
VOUT on TOP: 41.8,76 44,76 44,69.7 43.2,68.9 43.2,65.7 42,64.5 42,60.6 40.1,58.7 40.1,47 33,47 33,48.9 33.9,48.9 36.1,51.1 36.1,55.5 32,55.5 32,61.4 34.4,61.4 35.2,62.2 35.2,65.4 37.5,67.7 37.5,70.2 36,71.7 36,72.8 36.9,72.8 38,71.7 38,68.2 38.6,68.8 41.4,68.8 41.4,73.5 41.8,73.9
N00519 on TOP: 33,46.9 33,46.2 32.8,46 31.6,46 31.6,44.79 34.6,41.9 42.5,41.9 42.5,46.9
N01391 on TOP: 24.5,56 24.5,54.6 27.5,54.6 27.5,56
N01391 on TOP: 20.4,56 20.4,58.3 20.8,58.7 21.3,58.7 22.7,57.3 22.7,56
N01391 on BOTTOM: 28.8,54.6 23.6,54.6 20.4,57.8 20.4,58.3 20.8,58.7 21.1,58.7 23.8,56 28.8,56
N01601 on TOP: 27.1,67.5 25.2,67.5 25.2,68.7 26.1,69.6 27.1,69.6
N01601 on TOP: 30.7,69.7 31.6,69.7 31.6,62.2 29.1,59.7 21.5,59.7 19,57.2 19,56.2 18,56.2 18,57.3 21.1,60.4 24,60.4 24,61.5 24.9,61.5 24.9,60.4 28,60.4 28,61.5 29.7,61.5 30.2,62 30.2,69.2
N01601 on BOTTOM: 30.4,66.6 31.7,66.6 31.7,68.7 25.4,68.7 25.2,68.5 25.2,67.5 29.5,67.5
N03695 on TOP: 2.7,32 2.7,35 3.8,35 3.8,32
N03706 on TOP: 2.7,31 2.7,28 3.8,28 3.8,31
N11568 on TOP: 11.2,42.8 18,42.8 19.1,43.9 20,43.9 20,43.1 18.6,41.7 11.2,41.7
N11722 on TOP: 13.1,41.2 13.1,40.3 15.9,40.3 15.9,41.2
N15301 on TOP: 70.8,52 70.8,55 69.7,55 69.7,52
N16937 on TOP: 58.7,53.5 58.7,52.4 66.7,52.4 66.7,53.5
N16937 on TOP: 27.2,28.1 27.2,27.1 30.8,27.1 30.8,28.1
N31837 on TOP, BOTTOM: 39.4,82.9 39.4,80.1 48.7,80.1 48.7,82.9
N43589 on TOP: 31,39.7 31,40.8 26.7,40.8 26.7,39.7
N44439 on TOP: 24.3,48.9 24.3,46.1 25.3,46.1 25.3,48.9
N71300 on TOP: 26,73.5 26,72.6 24,70.6 24,69.7 25,69.7 27,71.7 27,73.5
N156569 on TOP: 23.2,75.5 26.5,75.5 27,75 27,73.7 26,73.7 25.8,73.5 25.8,72.8 22.4,69.4 21.5,69.4 21.5,70.5 22.8,71.8 23.9,71.8 23.9,73.7 23.2,74.4
N219565 on TOP: 42,77.8 39.6,75.4 39.6,74.9 36.7,74.9 36.1,74.3 36.1,73.2 36.9,73.2 37.8,74.1 41.6,74.1 41.6,75.8 41.9,76.1 44.2,76.1 44.2,74.9 43.1,73.8 43.1,73.1 44.9,73.1 44.9,77.8
N224890 on TOP: 1.2,35 1.2,28 2.3,28 2.3,35
N244106 on TOP, BOTTOM: 50.4,82.9 50.4,80.1 59.7,80.1 59.7,82.9
N244438 on TOP, BOTTOM: 28.4,82.9 28.4,80.1 37.7,80.1 37.7,82.9

## Text on the board
Ref Des/Silkscreen Bottom: UART | 5V | 3V3 | GND | TX | RX | 18650
Ref Des/Silkscreen Top: USB | OFF | ON
